# Altium PCB pcb.PcbDoc (part 1 of 2)
Units mm, origin at the board's own origin, x right, y up, seen from the top; angles counter-clockwise.
Board outline 220 x 120 mm, 8 copper layers (Top Layer, Internal 1, Internal 2, Internal 3, Internal 4, Internal 5, Internal 6, Bottom Layer), stack 1.684 mm thick; 227 components, 231 nets, 1122 pads, 16 vias.
Unrouted connection lines stored in the file: 734.
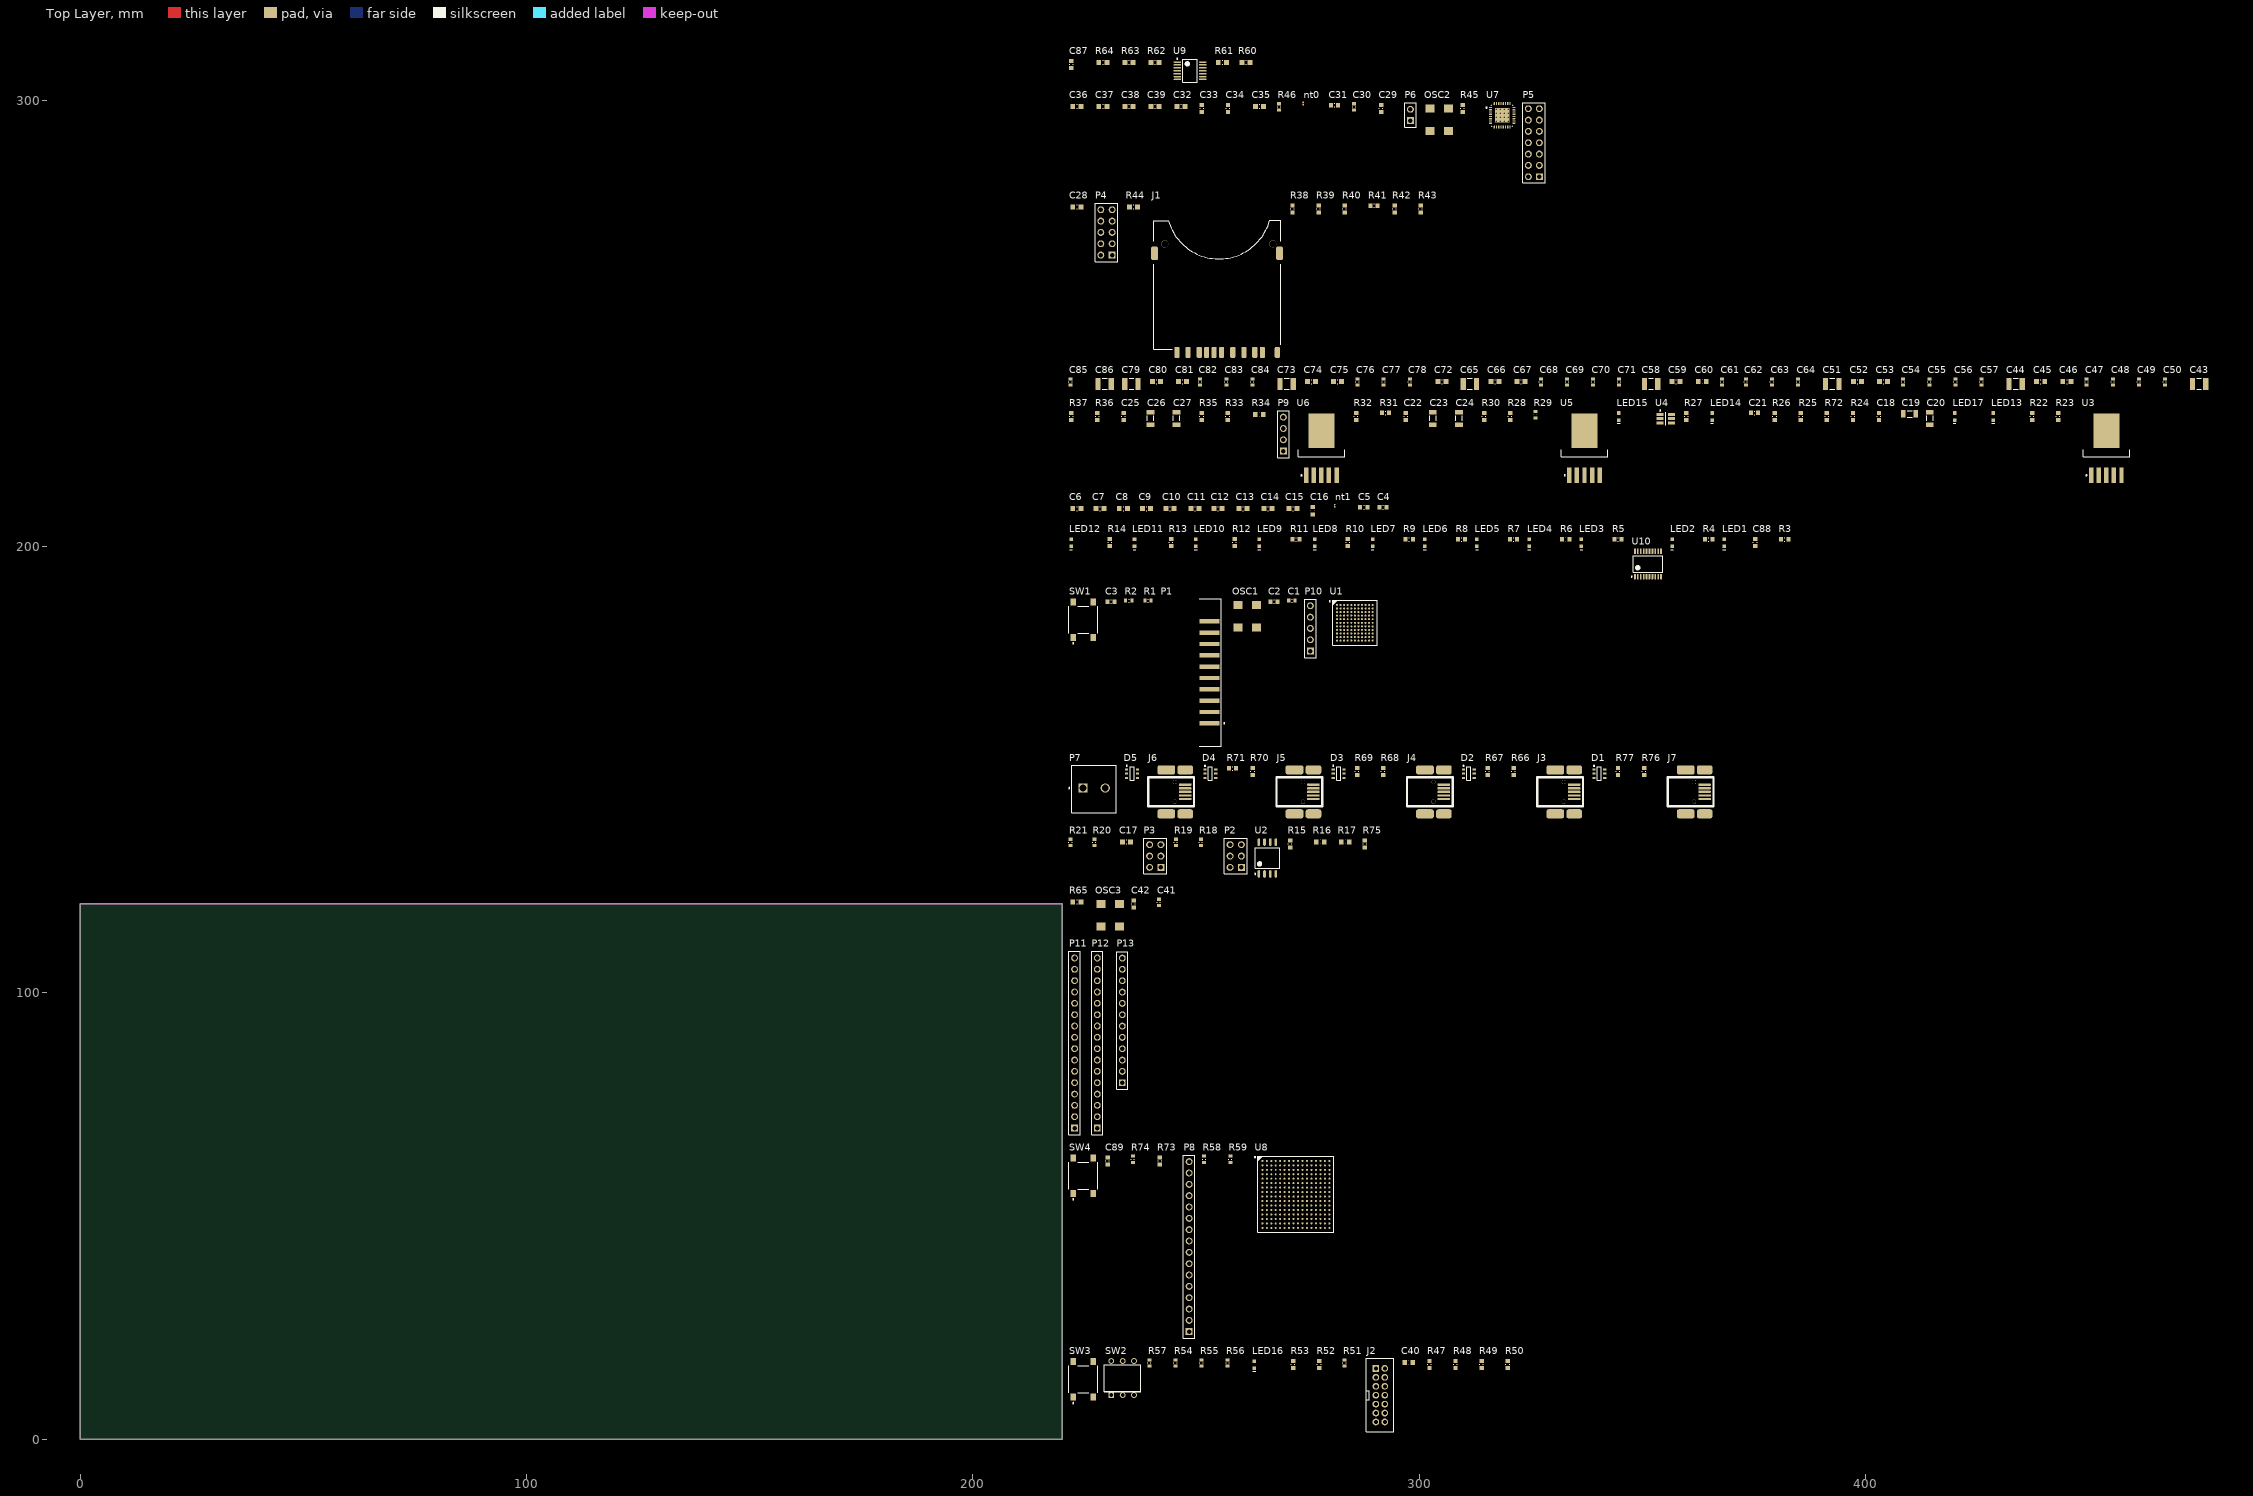
[diagram p0: Top Layer view]
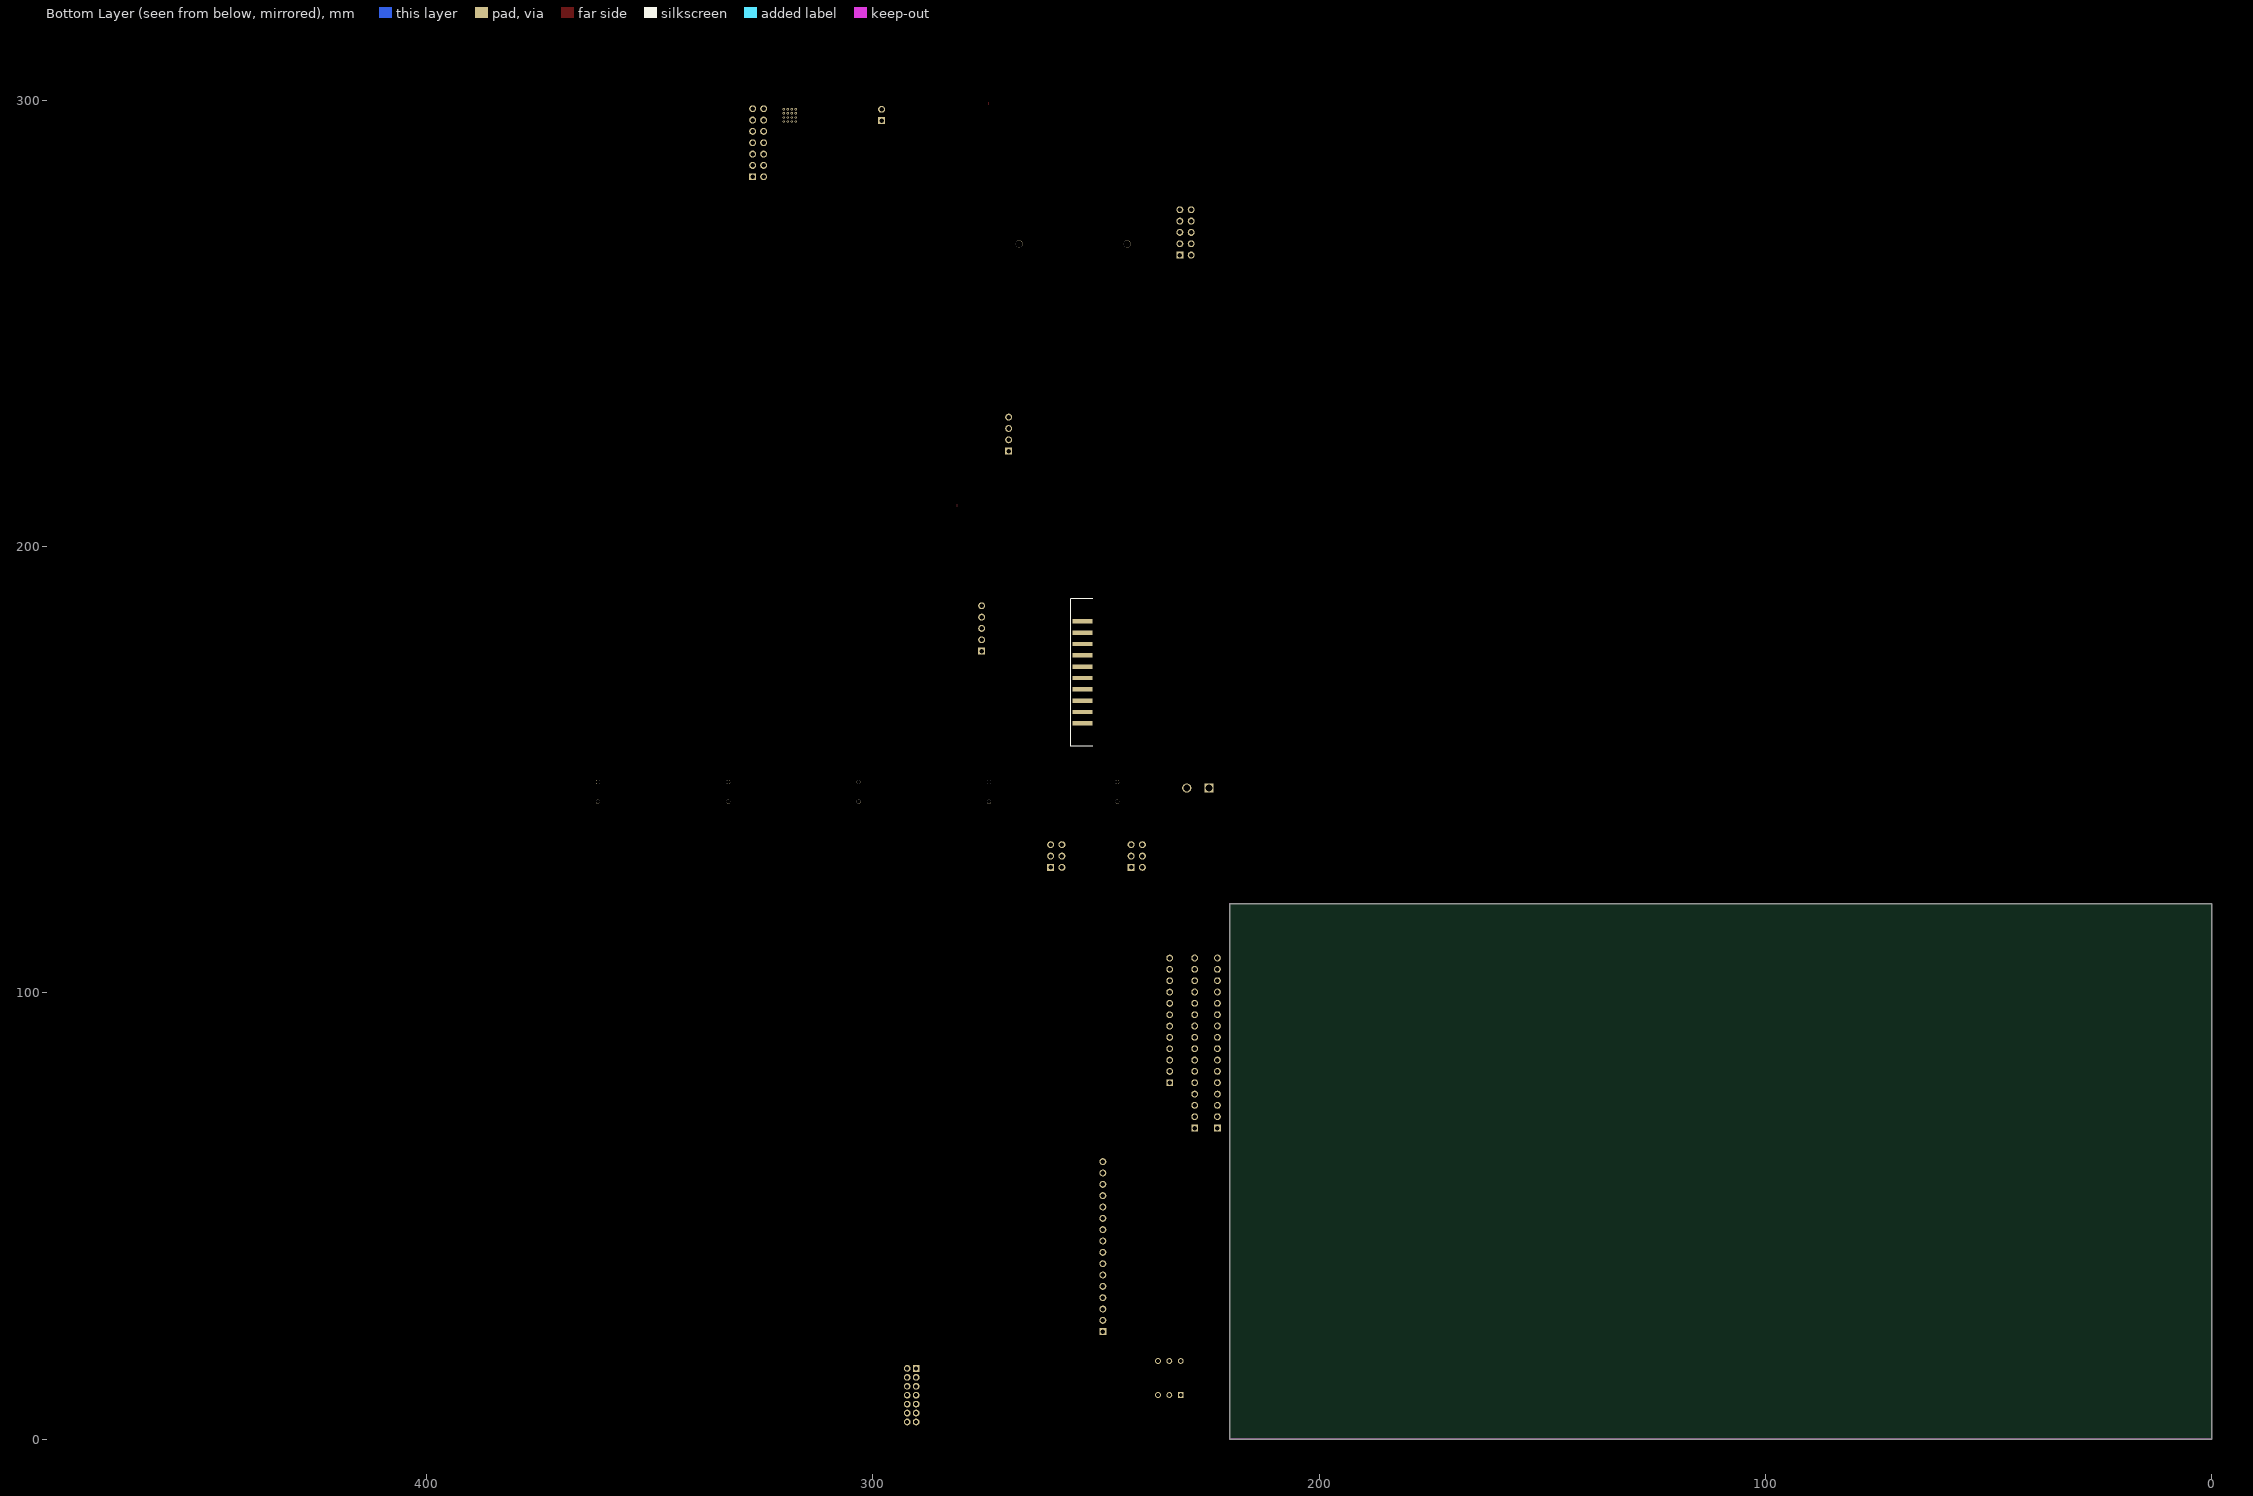
[diagram p1: Bottom Layer view, seen from below]

## Layer stack, top to bottom
Top Solder: solder mask 0.0102, Solder Resist, Dk 3.5
Top Layer: signal copper 0.0356
Dielectric 1: core 0.254, FR-4, Dk 4.2
Internal 1: signal copper 0.036
Dielectric 3: prepreg 0.127, Dk 4.2
Internal 2: signal copper 0.036
Dielectric 4: core 0.254, Dk 4.2
Internal 3: signal copper 0.036
Dielectric 5: prepreg 0.127, Dk 4.2
Internal 4: signal copper 0.036
Dielectric 6: core 0.254, Dk 4.2
Internal 5: signal copper 0.036
Dielectric 7: prepreg 0.127, Dk 4.2
Internal 6: signal copper 0.036
Dielectric 2: core 0.254, Dk 4.2
Bottom Layer: signal copper 0.0356
Bottom Solder: solder mask 0.0102, Solder Resist, Dk 3.5

## Board outline
0,0 0,120 220,120 220,0

## Design rules (kind name [scope] priority, off if disabled: settings)
Clearance [All] p1: gap=0.254
DiffPairsRouting [All] p1: maxlimit=0.254 minlimit=0.254 mostfreqgap=0.254 toplayer_minwidth=0.381 toplayer_maxwidth=0.381 toplayer_prefwidth=0.381 midlayer1_minwidth=0.381 midlayer1_maxwidth=0.381 midlayer1_prefwidth=0.381 midlayer2_minwidth=0.381 midlayer2_maxwidth=0.381 midlayer2_prefwidth=0.381 midlayer3_minwidth=0.381 midlayer3_maxwidth=0.381 midlayer3_prefwidth=0.381 midlayer4_minwidth=0.381 midlayer4_maxwidth=0.381 midlayer4_prefwidth=0.381 midlayer5_minwidth=0.381 midlayer5_maxwidth=0.381 midlayer5_prefwidth=0.381 midlayer6_minwidth=0.381 midlayer6_maxwidth=0.381 midlayer6_prefwidth=0.381 bottomlayer_minwidth=0.381 bottomlayer_maxwidth=0.381 bottomlayer_prefwidth=0.381 maxuncoupledlength=12.7
PolygonConnect [All] p1: connectstyle=Relief reliefconductorwidth=0.254 reliefentries=4 polygonreliefangle="90 Angle" airgapwidth=0.254
RoomDefinition USB_Transceiver [InComponentClass('USB_Transceiver')] p1: confinementstyle=ConfineIn formatcopy=TRUE lockcomponents=FALSE outline 221.145,303.647 263.947,303.647 263.947,312.248 221.145,312.248
RoomDefinition "USB 2.0 PHY" [InComponentClass('USB 2.0 PHY')] p2: confinementstyle=ConfineIn formatcopy=TRUE lockcomponents=FALSE outline 221.145,281.146 328.575,281.146 328.575,302.397 221.145,302.397
RoomDefinition SD [InComponentClass('SD')] p3: confinementstyle=ConfineIn formatcopy=TRUE lockcomponents=FALSE outline 221.145,242.019 304.224,242.019 304.224,279.896 221.145,279.896
RoomDefinition "Power Supply" [InComponentClass('Power Supply')] p4: confinementstyle=ConfineIn formatcopy=TRUE lockcomponents=FALSE outline 221.145,234.694 477.232,234.694 477.232,240.769 221.145,240.769
RoomDefinition Power_1 [InComponentClass('Power')] p5: confinementstyle=ConfineIn formatcopy=TRUE lockcomponents=FALSE outline 221.145,213.543 459.806,213.543 459.806,233.419 221.145,233.419
RoomDefinition Power [InComponentClass('Power')] p6: confinementstyle=ConfineIn formatcopy=TRUE lockcomponents=FALSE outline 221.145,213.543 459.806,213.543 459.806,233.419 221.145,233.419
RoomDefinition LEDs [InComponentClass('LEDs')] p7: confinementstyle=ConfineIn formatcopy=TRUE lockcomponents=FALSE outline 221.145,192.417 383.553,192.417 383.553,205.117 221.145,205.117
RoomDefinition IO [InComponentClass('IO')] p8: confinementstyle=ConfineIn formatcopy=TRUE lockcomponents=FALSE outline 221.145,155.065 291.248,155.065 291.248,191.167 221.145,191.167
RoomDefinition Connectors [InComponentClass('Connectors')] p9: confinementstyle=ConfineIn formatcopy=TRUE lockcomponents=FALSE outline 221.145,138.864 366.327,138.864 366.327,153.815 221.145,153.815
RoomDefinition "Configuration memory" [InComponentClass('Configuration memory')] p10: confinementstyle=ConfineIn formatcopy=TRUE lockcomponents=FALSE outline 221.145,125.414 291.748,125.414 291.748,137.614 221.145,137.614
RoomDefinition Bank35 [InComponentClass('Bank35')] p11: confinementstyle=ConfineIn formatcopy=TRUE lockcomponents=FALSE outline 221.145,113.488 245.296,113.488 245.296,124.139 221.145,124.139
RoomDefinition Bank15 [InComponentClass('Bank15')] p12: confinementstyle=ConfineIn formatcopy=TRUE lockcomponents=FALSE outline 221.145,67.886 236.446,67.886 236.446,112.238 221.145,112.238
RoomDefinition BANK14 [InComponentClass('BANK14')] p13: confinementstyle=ConfineIn formatcopy=TRUE lockcomponents=FALSE outline 221.145,22.259 281.523,22.259 281.523,66.611 221.145,66.611
RoomDefinition BANK0 [InComponentClass('BANK0')] p14: confinementstyle=ConfineIn formatcopy=TRUE lockcomponents=FALSE outline 221.145,1.408 323.75,1.408 323.75,20.983 221.145,20.983
RoutingVias [All] p1: holewidth=0.711 width=1.27 viastyle="Through Hole" minholewidth=0.711 minwidth=1.27 maxholewidth=0.711 maxwidth=1.27
SolderMaskExpansion [All] p1: expansion=0.102
Width [All] p1: maxlimit=0.254 minlimit=0.254 preferedwidth=0.254
29 further rules are at their usual default settings.

## Classes and differential pairs
net class EBI.D[0..15]: EBI.D0 EBI.D1 EBI.D2 EBI.D3 EBI.D4 EBI.D5 EBI.D6 EBI.D7 EBI.D8 EBI.D9 EBI.D10 EBI.D11 EBI.D12 EBI.D13 EBI.D14 EBI.D15
net class EBI.A[0..15]: EBI.A0 EBI.A1 EBI.A2 EBI.A3 EBI.A4 EBI.A5 EBI.A6 EBI.A7 EBI.A8 EBI.A9 EBI.A10 EBI.A11 EBI.A12 EBI.A13 EBI.A14 EBI.A15
component class USB_Transceiver: C87 R60 R61 R62 R63 R64 U9
component class "USB 2.0 PHY": C29 C30 C31 C32 C33 C34 C35 C36 C37 C38 C39 nt0 OSC2 P5 P6 R45 R46 U7
component class SD: C28 J1 P4 R38 R39 R40 R41 R42 R43 R44
component class Power: C18 C19 C20 C21 C22 C23 C24 C25 C26 C27 LED13 LED14 LED15 LED17 P9 R22 R23 R24 R25 R26 R27 R28 R29 R30 R31 R32 R33 R34 R35 R36 R37 R72 U3 U4 U5 U6
component class "Power Supply": C43 C44 C45 C46 C47 C48 C49 C50 C51 C52 C53 C54 C55 C56 C57 C58 C59 C60 C61 C62 C63 C64 C65 C66 C67 C68 C69 C70 C71 C72 C73 C74 C75 C76 C77 C78 C79 C80 C81 C82 C83 C84 C85 C86
component class LEDs: C88 LED1 LED2 LED3 LED4 LED5 LED6 LED7 LED8 LED9 LED10 LED11 LED12 R3 R4 R5 R6 R7 R8 R9 R10 R11 R12 R13 R14 U10
component class IO: C1 C2 C3 OSC1 P1 P10 R1 R2 SW1 U1
component class Connectors: D1 D2 D3 D4 D5 J3 J4 J5 J6 J7 P7 R66 R67 R68 R69 R70 R71 R76 R77
component class "Configuration memory": C17 P2 P3 R15 R16 R17 R18 R19 R20 R21 R75 U2
component class Bank35: C41 C42 OSC3 R65
component class Bank15: P11 P12 P13
component class BANK14: C89 P8 R58 R59 R73 R74 SW4 U8
component class BANK0: C40 J2 LED16 R47 R48 R49 R50 R51 R52 R53 R54 R55 R56 R57 SW2 SW3
differential pair USB2_HS.D: +USB2_HS.D_P -USB2_HS.D_N

## Components (designator, comment, footprint, x,y, rotation, side; value= is the part's Value field where it differs from the comment)
C1 "CAP 10nF 16V 0603(1608)" CAPC0603(1608)100_L 271.447,187.892 r0 top
C2 "CAP 15pF 16V 0603(1608)" CAPC0603(1608)100_N 267.472,187.692 r0 top
C3 "CAP 1uF 16V 0603(1608)" CAPC0603(1608)100_N 230.945,187.692 r0 top
C4 "CAP 1uF 16V 0603(1608)" CAPC0603(1608)100_N 291.898,208.818 r0 top
C5 "CAP 4.7uF 16V 0603(1608)" CAPC0603(1608)100_N 287.573,208.818 r0 top
C6 "CAP 100nF 16V 0603(1608)" CAPC0603(1608)100_M 223.27,208.518 r0 top
C7 "CAP 100nF 16V 0603(1608)" CAPC0603(1608)100_M 228.47,208.518 r0 top
C8 "CAP 100nF 16V 0603(1608)" CAPC0603(1608)100_M 233.695,208.518 r0 top
C9 "CAP 100nF 16V 0603(1608)" CAPC0603(1608)100_M 238.921,208.518 r0 top
C10 "CAP 100nF 16V 0603(1608)" CAPC0603(1608)100_M 244.146,208.518 r0 top
C11 "CAP 100nF 16V 0603(1608)" CAPC0603(1608)100_M 249.721,208.518 r0 top
C12 "CAP 100nF 16V 0603(1608)" CAPC0603(1608)100_M 254.946,208.518 r0 top
C13 "CAP 100nF 16V 0603(1608)" CAPC0603(1608)100_M 260.547,208.518 r0 top
C14 "CAP 100nF 16V 0603(1608)" CAPC0603(1608)100_M 266.147,208.518 r0 top
C15 "CAP 100nF 16V 0603(1608)" CAPC0603(1608)100_M 271.722,208.518 r0 top
C16 "CAP 10uF 10V 0603(1608)" CAPC0603(1608)100_N 276.123,208.043 r90 top
C17 "CAP 100nF 16V 0603(1608)" CAPC0603(1608)100_M 234.445,133.839 r0 top
C18 "CAP 2.2uF 16V 0603(1608)" CAPC0603(1608)55_N 403.004,229.194 r90 top
C19 "CAP 100uF 10V 1206(3216)" CAPC1206(3216)190_L 409.854,229.744 r0 top
C20 "CAP 100uF 10V 1206(3216)" CAPC1206(3216)190_L 414.404,228.719 r90 top
C21 "CAP 1uF 16V 0603(1608)" CAPC0603(1608)100_N 375.077,229.969 r0 top
C22 "CAP 2.2uF 16V 0603(1608)" CAPC0603(1608)55_N 297.024,229.194 r90 top
C23 "CAP 100uF 10V 1206(3216)" CAPC1206(3216)190_L 303.049,228.719 r90 top
C24 "CAP 100uF 10V 1206(3216)" CAPC1206(3216)190_L 308.899,228.719 r90 top
C25 "CAP 2.2uF 16V 0603(1608)" CAPC0603(1608)55_N 233.745,229.194 r90 top
C26 "CAP 100uF 10V 1206(3216)" CAPC1206(3216)190_L 239.796,228.719 r90 top
C27 "CAP 100uF 10V 1206(3216)" CAPC1206(3216)190_L 245.621,228.719 r90 top
C28 "CAP 100nF 16V 0603(1608)" CAPC0603(1608)100_M 223.27,276.121 r0 top
C29 "CAP 1uF 16V 0603(1608)" CAPC0603(1608)100_N 291.448,298.172 r90 top
C30 "CAP 10nF 16V 0603(1608)" CAPC0603(1608)100_L 285.398,298.522 r90 top
C31 "CAP 15pF 16V 0603(1608)" CAPC0603(1608)100_N 281.023,298.922 r0 top
C32 "CAP 100nF 16V 0603(1608)" CAPC0603(1608)100_M 246.646,298.622 r0 top
C33 "CAP 4.7uF 16V 0603(1608)" CAPC0603(1608)100_N 251.296,298.172 r90 top
C34 "CAP 4.7uF 16V 0603(1608)" CAPC0603(1608)100_N 257.147,298.172 r90 top
C35 "CAP 100nF 16V 0603(1608)" CAPC0603(1608)100_M 264.172,298.622 r0 top
C36 "CAP 100nF 16V 0603(1608)" CAPC0603(1608)100_M 223.27,298.622 r0 top
C37 "CAP 100nF 16V 0603(1608)" CAPC0603(1608)100_M 229.095,298.622 r0 top
C38 "CAP 100nF 16V 0603(1608)" CAPC0603(1608)100_M 234.945,298.622 r0 top
C39 "CAP 100nF 16V 0603(1608)" CAPC0603(1608)100_M 240.796,298.622 r0 top
C40 "CAP 100nF 16V 0603(1608)" CAPC0603(1608)100_M 297.649,17.208 r0 top
C41 "CAP 10nF 16V 0603(1608)" CAPC0603(1608)100_L 241.671,120.288 r90 top
C42 "CAP 15pF 16V 0603(1608)" CAPC0603(1608)100_N 236.021,119.913 r90 top
C43 "GRM32ER60J107ME20L" CAPC1210(3225)250_N 474.707,236.469 r0 top
C44 "GRM32ER60J107ME20L" CAPC1210(3225)250_N 433.605,236.469 r0 top
C45 "CAP 4.7uF 10V 0603(1608)" CAPC0603(1608)100_M 439.23,236.994 r0 top
C46 "CAP 4.7uF 10V 0603(1608)" CAPC0603(1608)100_M 445.081,236.994 r0 top
C47 "CAP 470nF 10V 0603(1608)" CAPC0603(1608)100_L 449.531,236.894 r90 top
C48 "CAP 470nF 10V 0603(1608)" CAPC0603(1608)100_L 455.381,236.894 r90 top
C49 "CAP 470nF 10V 0603(1608)" CAPC0603(1608)100_L 461.207,236.894 r90 top
C50 "CAP 470nF 10V 0603(1608)" CAPC0603(1608)100_L 467.057,236.894 r90 top
C51 "GRM32ER60J107ME20L" CAPC1210(3225)250_N 392.528,236.469 r0 top
C52 "CAP 4.7uF 10V 0603(1608)" CAPC0603(1608)100_M 398.153,236.994 r0 top
C53 "CAP 4.7uF 10V 0603(1608)" CAPC0603(1608)100_M 403.979,236.994 r0 top
C54 "CAP 470nF 10V 0603(1608)" CAPC0603(1608)100_L 408.429,236.894 r90 top
C55 "CAP 470nF 10V 0603(1608)" CAPC0603(1608)100_L 414.279,236.894 r90 top
C56 "CAP 470nF 10V 0603(1608)" CAPC0603(1608)100_L 420.13,236.894 r90 top
C57 "CAP 470nF 10V 0603(1608)" CAPC0603(1608)100_L 425.98,236.894 r90 top
C58 "GRM32ER60J107ME20L" CAPC1210(3225)250_N 351.926,236.469 r0 top
C59 "CAP 4.7uF 10V 0603(1608)" CAPC0603(1608)100_M 357.551,236.994 r0 top
C60 "CAP 4.7uF 10V 0603(1608)" CAPC0603(1608)100_M 363.402,236.994 r0 top
C61 "CAP 470nF 10V 0603(1608)" CAPC0603(1608)100_L 367.852,236.894 r90 top
C62 "CAP 470nF 10V 0603(1608)" CAPC0603(1608)100_L 373.177,236.894 r90 top
C63 "CAP 470nF 10V 0603(1608)" CAPC0603(1608)100_L 379.028,236.894 r90 top
C64 "CAP 470nF 10V 0603(1608)" CAPC0603(1608)100_L 384.878,236.894 r90 top
C65 "GRM32ER60J107ME20L" CAPC1210(3225)250_N 311.349,236.469 r0 top
C66 "CAP 4.7uF 10V 0603(1608)" CAPC0603(1608)100_M 316.974,236.994 r0 top
C67 "CAP 4.7uF 10V 0603(1608)" CAPC0603(1608)100_M 322.825,236.994 r0 top
C68 "CAP 470nF 10V 0603(1608)" CAPC0603(1608)100_L 327.275,236.894 r90 top
C69 "CAP 470nF 10V 0603(1608)" CAPC0603(1608)100_L 333.125,236.894 r90 top
C70 "CAP 470nF 10V 0603(1608)" CAPC0603(1608)100_L 338.951,236.894 r90 top
C71 "CAP 470nF 10V 0603(1608)" CAPC0603(1608)100_L 344.801,236.894 r90 top
C72 "CAP 100nF 16V 0603(1608)" CAPC0603(1608)100_M 305.099,236.994 r0 top
C73 "GRM32ER60J107ME20L" CAPC1210(3225)250_N 270.272,236.469 r0 top
C74 "CAP 4.7uF 10V 0603(1608)" CAPC0603(1608)100_M 275.872,236.994 r0 top
C75 "CAP 4.7uF 10V 0603(1608)" CAPC0603(1608)100_M 281.723,236.994 r0 top
C76 "CAP 470nF 10V 0603(1608)" CAPC0603(1608)100_L 286.173,236.894 r90 top
C77 "CAP 470nF 10V 0603(1608)" CAPC0603(1608)100_L 292.023,236.894 r90 top
C78 "CAP 470nF 10V 0603(1608)" CAPC0603(1608)100_L 297.874,236.894 r90 top
C79 "GRM32ER60J107ME20L" CAPC1210(3225)250_N 235.521,236.469 r0 top
C80 "CAP 4.7uF 10V 0603(1608)" CAPC0603(1608)100_M 241.146,236.994 r0 top
C81 "CAP 4.7uF 10V 0603(1608)" CAPC0603(1608)100_M 246.996,236.994 r0 top
C82 "CAP 470nF 10V 0603(1608)" CAPC0603(1608)100_L 250.921,236.894 r90 top
C83 "CAP 470nF 10V 0603(1608)" CAPC0603(1608)100_L 256.772,236.894 r90 top
C84 "CAP 470nF 10V 0603(1608)" CAPC0603(1608)100_L 262.622,236.894 r90 top
C85 "CAP 470nF 10V 0603(1608)" CAPC0603(1608)100_L 221.87,236.894 r90 top
C86 "GRM32ER60J107ME20L" CAPC1210(3225)250_N 229.495,236.469 r0 top
C87 "CAP 1uF 16V 0603(1608)" CAPC0603(1608)100_N 222.07,308.022 r90 top
C88 "CAP 1uF 16V 0603(1608)" CAPC0603(1608)100_N 375.277,200.892 r90 top
C89 "CAP 1uF 16V 0603(1608)" CAPC0603(1608)100_N 230.17,62.386 r90 top
D1 "IP4220CZ6" "NXP SOT457" 340.351,149.165 r0 top
D2 "IP4220CZ6" "NXP SOT457" 311.124,149.165 r0 top
D3 "IP4220CZ6" "NXP SOT457" 281.923,149.165 r0 top
D4 "IP4220CZ6" "NXP SOT457" 253.196,149.165 r0 top
D5 "IP4220CZ6" "NXP SOT457" 235.646,149.165 r0 top
J1 "KSDC012551" KONV-KSDC012551_V 254.696,255.67 r0 top
J2 "2x7 2mm header" "2x7 2mm" 290.273,15.883 r0 top
J3 "67503-1020" MOLX-67503-1020_V 334.7,146.665 r0 top
J4 "67503-1020" MOLX-67503-1020_V 305.499,146.665 r0 top
J5 "67503-1020" MOLX-67503-1020_V 276.273,146.665 r0 top
J6 "67503-1020" MOLX-67503-1020_V 247.546,146.665 r0 top
J7 "67503-1020" MOLX-67503-1020_V 363.927,146.665 r0 top
LED1 "150060RS75000" 0603_A 368.352,200.842 r90 top
LED2 "150060RS75000" 0603_A 356.651,200.842 r90 top
LED3 "150060RS75000" 0603_A 336.325,200.842 r90 top
LED4 "150060RS75000" 0603_A 324.625,200.842 r90 top
LED5 "150060RS75000" 0603_A 312.924,200.842 r90 top
LED6 "150060RS75000" 0603_A 301.249,200.842 r90 top
LED7 "150060RS75000" 0603_A 289.548,200.842 r90 top
LED8 "150060RS75000" 0603_A 276.598,200.842 r90 top
LED9 "150060RS75000" 0603_A 264.147,200.842 r90 top
LED10 "150060RS75000" 0603_A 249.921,200.842 r90 top
LED11 "150060RS75000" 0603_A 236.196,200.842 r90 top
LED12 "150060RS75000" 0603_A 221.995,200.842 r90 top
LED13 "150060RS75000" 0603_A 428.605,229.144 r90 top
LED14 "150060RS75000" 0603_A 365.602,229.144 r90 top
LED15 "150060RS75000" 0603_A 344.701,229.144 r90 top
LED16 "150060RS75000" 0603_A 263.047,16.708 r90 top
LED17 "150060RS75000" 0603_A 419.955,229.144 r90 top
nt0 "net tie" "net tie" 274.047,299.272 r90 top net-tie
nt1 "net tie" "net tie" 281.098,209.168 r90 top net-tie
OSC1 "FXO-HC736R-48" FXO-HC73 258.347,187.817 r0 top
OSC2 "FXO-H736R-24" FXO-HC73 301.374,299.047 r0 top
OSC3 "FXO-HC736R-100" FXO-HC73 227.67,120.813 r0 top
P1 "BH2542-20-SPGRH-3.0" PCE-BH2542-20-SPGRH-3.0_VA 252.996,171.841 r90 top
P2 "TSW-103-08-T-D" SMTC-TSW-103-08-X-D 260.147,128.139 r90 top
P3 "TSW-103-08-T-D" SMTC-TSW-103-08-X-D 242.121,128.139 r90 top
P4 "TSW-105-05-T-D" SMTC-TSW-105-05-X-D 231.195,265.32 r90 top
P5 "HTSW-107-42-F-D" SMTC-HTSW-107-42-X-D 326.9,282.871 r90 top
P6 "TSW-102-26-L-S" SMTC-TSW-102-26-XX-S 298.024,295.447 r90 top
P7 "SCREW-5.0/5.08 2WAYS" SCREW-5.0-2WAYS_V 227.145,145.915 r0 top
P8 "TSW-116-08-G-S" SMTC-TSW-116-08-X-S 248.446,24.109 r90 top
P9 "TSW-104-08-G-S" SMTC-TSW-104-08-X-S 269.547,221.393 r90 top
P10 "TSW-105-05-T-S" SMTC-TSW-105-05-X-S 275.597,176.591 r90 top
P11 "MTLW-116-07-F-S-265" SMTC-MTLW-116-07-X-S-265 222.77,69.736 r90 top
P12 "MTLW-116-07-F-S-265" SMTC-MTLW-116-07-X-S-265 227.87,69.736 r90 top
P13 "MTLW-112-07-L-S-125" SMTC-MTLW-112-07-X-S-125 233.47,79.886 r90 top
R1 "15R 5% 0603(1608)" RESC0603(1608)_L 239.221,187.892 r0 top
R2 "15R 5% 0603(1608)" RESC0603(1608)_L 234.92,187.892 r0 top
R3 "470R 5% 0603(1608)" RESC0603(1608)_N 381.878,201.642 r0 top
R4 "470R 5% 0603(1608)" RESC0603(1608)_N 364.852,201.642 r0 top
R5 "470R 5% 0603(1608)" RESC0603(1608)_N 344.526,201.642 r0 top
R6 "470R 5% 0603(1608)" RESC0603(1608)_N 332.825,201.642 r0 top
R7 "470R 5% 0603(1608)" RESC0603(1608)_N 321.125,201.642 r0 top
R8 "470R 5% 0603(1608)" RESC0603(1608)_N 309.449,201.642 r0 top
R9 "470R 5% 0603(1608)" RESC0603(1608)_N 297.749,201.642 r0 top
R10 "470R 5% 0603(1608)" RESC0603(1608)_N 284.023,200.892 r90 top
R11 "470R 5% 0603(1608)" RESC0603(1608)_N 272.347,201.642 r0 top
R12 "470R 5% 0603(1608)" RESC0603(1608)_N 258.622,200.892 r90 top
R13 "470R 5% 0603(1608)" RESC0603(1608)_N 244.396,200.892 r90 top
R14 "470R 5% 0603(1608)" RESC0603(1608)_N 230.695,200.892 r90 top
R15 "4K7 5% 0603(1608)" RESC0603(1608)_N 271.047,133.389 r90 top
R16 "1K8 5% 0603(1608)" RESC0603(1608)_M 277.823,133.839 r0 top
R17 "1K8 5% 0603(1608)" RESC0603(1608)_M 283.423,133.839 r0 top
R18 "100R 5% 0603(1608)" RESC0603(1608)_L 251.071,133.739 r90 top
R19 "100R 5% 0603(1608)" RESC0603(1608)_L 245.471,133.739 r90 top
R20 "100R 5% 0603(1608)" RESC0603(1608)_L 227.195,133.739 r90 top
R21 "100R 5% 0603(1608)" RESC0603(1608)_L 221.87,133.739 r90 top
R22 "10K 1% 0603(1608)" RESC0603(1608)_N 437.305,229.194 r90 top
R23 "45K3 1% 0603(1608)" RESC0603(1608)_N 443.156,229.194 r90 top
R24 "10K 1% 0603(1608)" RESC0603(1608)_N 397.178,229.194 r90 top
R25 "470R 5% 0603(1608)" RESC0603(1608)_N 385.503,229.194 r90 top
R26 "470R 5% 0603(1608)" RESC0603(1608)_N 379.653,229.194 r90 top
R27 "470R 5% 0603(1608)" RESC0603(1608)_N 359.852,229.194 r90 top
R28 "10K 1% 0603(1608)" RESC0603(1608)_N 320.375,229.194 r90 top
R29 "20K 1% 0603(1608)" RESC0603(1608)_L 326.025,229.544 r90 top
R30 "10K 5% 0603(1608)" RESC0603(1608)_N 314.524,229.194 r90 top
R31 "10K 1% 0603(1608)" RESC0603(1608)_N 292.448,229.969 r0 top
R32 "4K7 5% 0603(1608)" RESC0603(1608)_N 285.848,229.194 r90 top
R33 "10K 1% 0603(1608)" RESC0603(1608)_N 257.097,229.194 r90 top
R34 "6K65 1% 0603(1608)" RESC0603(1608)_M 264.147,229.644 r0 top
R35 "10K 5% 0603(1608)" RESC0603(1608)_N 251.271,229.194 r90 top
R36 "10K 1% 0603(1608)" RESC0603(1608)_N 227.895,229.194 r90 top
R37 "10K 5% 0603(1608)" RESC0603(1608)_N 222.07,229.194 r90 top
R38 "100K 1% 0603(1608)" RESC0603(1608)_N 271.597,275.671 r90 top
R39 "100K 1% 0603(1608)" RESC0603(1608)_N 277.448,275.671 r90 top
R40 "100K 1% 0603(1608)" RESC0603(1608)_N 283.298,275.671 r90 top
R41 "100K 1% 0603(1608)" RESC0603(1608)_N 289.898,276.421 r0 top
R42 "100K 1% 0603(1608)" RESC0603(1608)_N 294.473,275.671 r90 top
R43 "4K7 1% 0603(1608)" RESC0603(1608)_N 300.299,275.671 r90 top
R44 "300K 1% 0603(1608)" RESC0603(1608)_M 235.946,276.121 r0 top
R45 "820R 5% 0603(1608)" RESC0603(1608)_N 309.724,298.172 r90 top
R46 "12K 1% 0603(1608)" RESC0603(1608)_L 268.622,298.522 r90 top
R47 "10K 5% 0603(1608)" RESC0603(1608)_N 302.299,16.758 r90 top
R48 "10K 5% 0603(1608)" RESC0603(1608)_N 308.124,16.758 r90 top
R49 "10K 5% 0603(1608)" RESC0603(1608)_N 313.974,16.758 r90 top
R50 "10K 5% 0603(1608)" RESC0603(1608)_N 319.825,16.758 r90 top
R51 "200R 5% 0603(1608)" RESC0603(1608)_L 283.248,17.108 r90 top
R52 "4K7 1% 0603(1608)" RESC0603(1608)_N 277.598,16.758 r90 top
R53 "4K7 1% 0603(1608)" RESC0603(1608)_N 271.747,16.758 r90 top
R54 "1K 5% 0603(1608)" RESC0603(1608)_L 245.396,17.108 r90 top
R55 "1K 5% 0603(1608)" RESC0603(1608)_L 251.221,17.108 r90 top
R56 "1K 5% 0603(1608)" RESC0603(1608)_L 257.072,17.108 r90 top
R57 "100R 5% 0603(1608)" RESC0603(1608)_L 239.546,17.108 r90 top
R58 "1K 5% 0603(1608)" RESC0603(1608)_L 251.821,62.736 r90 top
R59 "1K 5% 0603(1608)" RESC0603(1608)_L 257.672,62.736 r90 top
R60 "33R 5% 0603(1608)" RESC0603(1608)_M 261.197,308.498 r0 top
R61 "33R 5% 0603(1608)" RESC0603(1608)_M 255.872,308.498 r0 top
R62 "1K2 1% 0603(1608)" RESC0603(1608)_M 240.796,308.498 r0 top
R63 "33R 5% 0603(1608)" RESC0603(1608)_M 234.945,308.498 r0 top
R64 "33R 5% 0603(1608)" RESC0603(1608)_M 229.095,308.498 r0 top
R65 "1K2 1% 0603(1608)" RESC0603(1608)_M 223.27,120.388 r0 top
R66 "Jumper 0603(1608)" RESC0603(1608)_N 321.15,149.59 r90 top
R67 "Jumper 0603(1608)" RESC0603(1608)_N 315.299,149.59 r90 top
R68 "Jumper 0603(1608)" RESC0603(1608)_N 291.923,149.59 r90 top
R69 "Jumper 0603(1608)" RESC0603(1608)_N 286.073,149.59 r90 top
R70 "Jumper 0603(1608)" RESC0603(1608)_N 262.697,149.59 r90 top
R71 "Jumper 0603(1608)" RESC0603(1608)_N 258.122,150.34 r0 top
R72 "470R 5% 0603(1608)" RESC0603(1608)_N 391.328,229.194 r90 top
R73 "4K7 1% 0603(1608)" RESC0603(1608)_N 241.871,62.386 r90 top
R74 "200R 5% 0603(1608)" RESC0603(1608)_L 235.821,62.736 r90 top
R75 "4K7 5% 0603(1608)" RESC0603(1608)_N 287.823,133.389 r90 top
R76 "Jumper 0603(1608)" RESC0603(1608)_N 350.376,149.59 r90 top
R77 "Jumper 0603(1608)" RESC0603(1608)_N 344.526,149.59 r90 top
SW1 "B3S-1000" OMRON-B3S-1000-4_V 224.72,183.616 r90 top
SW2 "418127270903" 418127270903 233.545,13.733 r0 top
SW3 "B3S-1000" OMRON-B3S-1000-4_V 224.72,13.433 r90 top
SW4 "B3S-1000" OMRON-B3S-1000-4_V 224.72,59.06 r90 top
U1 "EFM32GG990F1024-BGA112" ENMR-BGA112 285.573,182.941 r0 top
U2 "N25Q128A13ESE40E" MICT-SE-8_N 265.972,130.239 r90 top
U3 "LP38501ATJ-ADJ/NOPB" TJ5A_M 453.931,222.018 r90 top
U4 "LT6700HVIS6-3#TRPBF" LT-S6_M 355.226,228.669 r0 top
U5 "LP38501ATJ-ADJ/NOPB" TJ5A_M 337.025,222.018 r90 top
U6 "LP38501ATJ-ADJ/NOPB" TJ5A_M 278.073,222.018 r90 top
U7 "USB3300-EZK-TR" MCHP-QFN-32-5x5_V2 318.575,296.622 r0 top
U8 "XC7A35T-2FTG256I" FTG256 272.347,54.885 r0 top
U9 "TUSB2551APW" PW14_N 248.646,306.622 r0 top
U10 "SN74HC240PWR" PW0020A_L 351.251,196.142 r90 top

## Footprints (in the part's own frame and the unit in brackets; to place one, negate y for a bottom-side part, rotate by r counter-clockwise, add the part's x,y. Pads: shape width x height; smd on the part's side, far side on the other; paste and mask are expansions set on the pad)
"2x7 2mm" [mm] "2x7 2mm pitch molex vertical shrouded header"
  rect 1.5x1.5 hole 0.9: 1(0,0)
  round 1.5 hole 0.9: 2(2,0) 3(0,-2) 4(2,-2) 5(0,-4) 6(2,-4) 7(0,-6) 8(2,-6) 9(0,-8) 10(2,-8) 11(0,-10) 12(2,-10) 13(0,-12) 14(2,-12)
  silkscreen extent -2.15,-14.2 4,2.27, body extent -2.2,-14.3 4.1,2.35, height 6.41
0603_A [mm] "Chip LED, 2-Leads, Body 1.6x0.8mm, IPC Medium Density"
  rect 0.8x0.8 smd: 1(-0.8,0) 2(0.8,0)
  silkscreen extent -1.5,-0.3 -1.5,0.3, body extent -0.8,-0.4 0.8,0.4, height 0.7
418127270903 [mm] "03p, 2.54mm Pitch, Horizontal, IC Type, THT, raised Actuator, black, without Tape, Tube"
  rect 1.3x1.3 hole 0.8: 1(-2.54,-3.81)
  round 1.3 hole 0.8: 2(0,-3.81) 3(2.54,-3.81) 4(2.54,3.81) 5(0,3.81) 6(-2.54,3.81)
  silkscreen extent -4.08,-3.02 4.08,3.02, body extent -4.03,-3.93 4.03,3.94, height 4.35
CAPC0603(1608)55_N [mm] "Chip Capacitor, Body 1.6x0.8mm, Height 0.55mm, IPC Medium Density"
  rect 0.9x1 smd: 1(-0.8,0) 2(0.8,0)
  silkscreen extent -0.05,-0.4 0.05,0.4, body extent -0.87,-0.48 0.88,0.47, height 0.55
CAPC0603(1608)100_L [mm] "Chip Capacitor, Body 1.6x0.8mm, Height 1.0mm, IPC High Density"
  rect 0.7x0.9 smd: 1(-0.7,0) 2(0.7,0)
  silkscreen extent -0.05,-0.35 0.05,0.35, body extent -0.87,-0.47 0.88,0.48, height 1
CAPC0603(1608)100_M [mm] "Chip Capacitor, Body 1.6x0.8mm, Height 1.0mm, IPC Low Density"
  rect 1.1x1.1 smd: 1(-0.9,0) 2(0.9,0)
  silkscreen extent -0.05,-0.45 0.05,0.45, body extent -0.87,-0.47 0.88,0.48, height 1
CAPC0603(1608)100_N [mm] "Chip Capacitor, Body 1.6x0.8mm, Height 1.0mm, IPC Medium Density"
  rect 0.9x1 smd: 1(-0.8,0) 2(0.8,0)
  silkscreen extent -0.05,-0.4 0.05,0.4, body extent -0.87,-0.48 0.88,0.47, height 1
CAPC1206(3216)190_L [mm] "Chip Capacitor, Body 3.2x1.6mm, Height 1.9mm, IPC High Density"
  rect 0.95x1.7 smd: 1(-1.4,0) 2(1.4,0)
  silkscreen extent -0.55,-0.75 0.55,0.75, body extent -1.7,-0.9 1.7,0.9, height 1.9
CAPC1210(3225)250_N [mm] "Chip Capacitor, Body 3.2x2.5mm, Height 2.5mm, IPC Medium Density"
  rect 1.15x2.7 smd: 1(-1.5,0) 2(1.5,0)
  silkscreen extent -0.55,-1.25 0.55,1.25, body extent -1.7,-1.35 1.7,1.35, height 2.5
ENMR-BGA112 [mm] "BGA, 112-Balls, Body 10x10mm, Pitch 0.8mm"
  round 0.45 smd: A1(-4,4) A2(-3.2,4) A3(-2.4,4) A4(-1.6,4) A5(-0.8,4) A6(0,4) A7(0.8,4) A8(1.6,4) A9(2.4,4) A10(3.2,4) A11(4,4) B1(-4,3.2) B2(-3.2,3.2) B3(-2.4,3.2) B4(-1.6,3.2) B5(-0.8,3.2) B6(0,3.2) B7(0.8,3.2) B8(1.6,3.2) B9(2.4,3.2) B10(3.2,3.2) B11(4,3.2) C1(-4,2.4) C2(-3.2,2.4) C3(-2.4,2.4) C4(-1.6,2.4) C5(-0.8,2.4) C6(0,2.4) C7(0.8,2.4) C8(1.6,2.4) C9(2.4,2.4) C10(3.2,2.4) C11(4,2.4) D1(-4,1.6) D2(-3.2,1.6) D3(-2.4,1.6) D4(-1.6,1.6) D5(-0.8,1.6) D6(0,1.6) D7(0.8,1.6) D8(1.6,1.6) D9(2.4,1.6) D10(3.2,1.6) D11(4,1.6) E1(-4,0.8) E2(-3.2,0.8) E3(-2.4,0.8) E4(-1.6,0.8) E5(-0.8,0.8) E6(0,0.8) E7(0.8,0.8) E8(1.6,0.8) E9(2.4,0.8) E10(3.2,0.8) E11(4,0.8) F1(-4,0) F2(-3.2,0) F3(-2.4,0) F4(-1.6,0) F5(-0.8,0) F6(0,0) F7(0.8,0) F8(1.6,0) F9(2.4,0) F10(3.2,0) F11(4,0) G1(-4,-0.8) G2(-3.2,-0.8) G3(-2.4,-0.8) G4(-1.6,-0.8) G5(-0.8,-0.8) G6(0,-0.8) G7(0.8,-0.8) G8(1.6,-0.8) G9(2.4,-0.8) G10(3.2,-0.8) G11(4,-0.8) H1(-4,-1.6) H2(-3.2,-1.6) H3(-2.4,-1.6) H4(-1.6,-1.6) H5(-0.8,-1.6) H6(0,-1.6) H7(0.8,-1.6) H8(1.6,-1.6) H9(2.4,-1.6) H10(3.2,-1.6) H11(4,-1.6) J1(-4,-2.4) J2(-3.2,-2.4) J3(-2.4,-2.4) J4(-1.6,-2.4) J5(-0.8,-2.4) J6(0,-2.4) J7(0.8,-2.4) J8(1.6,-2.4) J9(2.4,-2.4) J10(3.2,-2.4) J11(4,-2.4) K1(-4,-3.2) K2(-3.2,-3.2) K3(-2.4,-3.2) K4(-1.6,-3.2) K5(-0.8,-3.2) K6(0,-3.2) K7(0.8,-3.2) K8(1.6,-3.2) K9(2.4,-3.2) K10(3.2,-3.2) K11(4,-3.2) L1(-4,-4) L2(-3.2,-4) L3(-2.4,-4) L4(-1.6,-4) L5(-0.8,-4) L6(0,-4) L7(0.8,-4) L8(1.6,-4) L9(2.4,-4) L10(3.2,-4) L11(4,-4)
  silkscreen extent -5.77,-5 5,5, body extent -5,-5 5,5, height 1.3
FTG256 [mm] "BGA, 256-Balls, Body 17x17mm, Pitch 1mm"
  round 0.45 smd: A1(-7.5,7.5) A2(-6.5,7.5) A3(-5.5,7.5) A4(-4.5,7.5) A5(-3.5,7.5) A6(-2.5,7.5) A7(-1.5,7.5) A8(-0.5,7.5) A9(0.5,7.5) A10(1.5,7.5) A11(2.5,7.5) A12(3.5,7.5) A13(4.5,7.5) A14(5.5,7.5) A15(6.5,7.5) A16(7.5,7.5) B1(-7.5,6.5) B2(-6.5,6.5) B3(-5.5,6.5) B4(-4.5,6.5) B5(-3.5,6.5) B6(-2.5,6.5) B7(-1.5,6.5) B8(-0.5,6.5) B9(0.5,6.5) B10(1.5,6.5) B11(2.5,6.5) B12(3.5,6.5) B13(4.5,6.5) B14(5.5,6.5) B15(6.5,6.5) B16(7.5,6.5) C1(-7.5,5.5) C2(-6.5,5.5) C3(-5.5,5.5) C4(-4.5,5.5) C5(-3.5,5.5) C6(-2.5,5.5) C7(-1.5,5.5) C8(-0.5,5.5) C9(0.5,5.5) C10(1.5,5.5) C11(2.5,5.5) C12(3.5,5.5) C13(4.5,5.5) C14(5.5,5.5) C15(6.5,5.5) C16(7.5,5.5) D1(-7.5,4.5) D2(-6.5,4.5) D3(-5.5,4.5) D4(-4.5,4.5) D5(-3.5,4.5) D6(-2.5,4.5) D7(-1.5,4.5) D8(-0.5,4.5) D9(0.5,4.5) D10(1.5,4.5) D11(2.5,4.5) D12(3.5,4.5) D13(4.5,4.5) D14(5.5,4.5) D15(6.5,4.5) D16(7.5,4.5) E1(-7.5,3.5) E2(-6.5,3.5) E3(-5.5,3.5) E4(-4.5,3.5) E5(-3.5,3.5) E6(-2.5,3.5) E7(-1.5,3.5) E8(-0.5,3.5) E9(0.5,3.5) E10(1.5,3.5) E11(2.5,3.5) E12(3.5,3.5) E13(4.5,3.5) E14(5.5,3.5) E15(6.5,3.5) E16(7.5,3.5) F1(-7.5,2.5) F2(-6.5,2.5) F3(-5.5,2.5) F4(-4.5,2.5) F5(-3.5,2.5) F6(-2.5,2.5) F7(-1.5,2.5) F8(-0.5,2.5) F9(0.5,2.5) F10(1.5,2.5) F11(2.5,2.5) F12(3.5,2.5) F13(4.5,2.5) F14(5.5,2.5) F15(6.5,2.5) F16(7.5,2.5) G1(-7.5,1.5) G2(-6.5,1.5) G3(-5.5,1.5) G4(-4.5,1.5) G5(-3.5,1.5) G6(-2.5,1.5) G7(-1.5,1.5) G8(-0.5,1.5) G9(0.5,1.5) G10(1.5,1.5) G11(2.5,1.5) G12(3.5,1.5) G13(4.5,1.5) G14(5.5,1.5) G15(6.5,1.5) G16(7.5,1.5) H1(-7.5,0.5) H2(-6.5,0.5) H3(-5.5,0.5) H4(-4.5,0.5) H5(-3.5,0.5) H6(-2.5,0.5) H7(-1.5,0.5) H8(-0.5,0.5) H9(0.5,0.5) H10(1.5,0.5) H11(2.5,0.5) H12(3.5,0.5) H13(4.5,0.5) H14(5.5,0.5) H15(6.5,0.5) H16(7.5,0.5) J1(-7.5,-0.5) J2(-6.5,-0.5) J3(-5.5,-0.5) J4(-4.5,-0.5) J5(-3.5,-0.5) J6(-2.5,-0.5) J7(-1.5,-0.5) J8(-0.5,-0.5) J9(0.5,-0.5) J10(1.5,-0.5) J11(2.5,-0.5) J12(3.5,-0.5) J13(4.5,-0.5) J14(5.5,-0.5) J15(6.5,-0.5) J16(7.5,-0.5) K1(-7.5,-1.5) K2(-6.5,-1.5) K3(-5.5,-1.5) K4(-4.5,-1.5) K5(-3.5,-1.5) K6(-2.5,-1.5) K7(-1.5,-1.5) K8(-0.5,-1.5) K9(0.5,-1.5) K10(1.5,-1.5) K11(2.5,-1.5) K12(3.5,-1.5) K13(4.5,-1.5) K14(5.5,-1.5) K15(6.5,-1.5) K16(7.5,-1.5) L1(-7.5,-2.5) L2(-6.5,-2.5) L3(-5.5,-2.5) L4(-4.5,-2.5) L5(-3.5,-2.5) L6(-2.5,-2.5) L7(-1.5,-2.5) L8(-0.5,-2.5) L9(0.5,-2.5) L10(1.5,-2.5) L11(2.5,-2.5) L12(3.5,-2.5) L13(4.5,-2.5) L14(5.5,-2.5) L15(6.5,-2.5) L16(7.5,-2.5) M1(-7.5,-3.5) M2(-6.5,-3.5) M3(-5.5,-3.5) M4(-4.5,-3.5) M5(-3.5,-3.5) M6(-2.5,-3.5) M7(-1.5,-3.5) M8(-0.5,-3.5) M9(0.5,-3.5) M10(1.5,-3.5) M11(2.5,-3.5) M12(3.5,-3.5) M13(4.5,-3.5) M14(5.5,-3.5) M15(6.5,-3.5) M16(7.5,-3.5) N1(-7.5,-4.5) N2(-6.5,-4.5) N3(-5.5,-4.5) N4(-4.5,-4.5) N5(-3.5,-4.5) N6(-2.5,-4.5) N7(-1.5,-4.5) N8(-0.5,-4.5) N9(0.5,-4.5) N10(1.5,-4.5) N11(2.5,-4.5) N12(3.5,-4.5) N13(4.5,-4.5) N14(5.5,-4.5) N15(6.5,-4.5) N16(7.5,-4.5) P1(-7.5,-5.5) P2(-6.5,-5.5) P3(-5.5,-5.5) P4(-4.5,-5.5) P5(-3.5,-5.5) P6(-2.5,-5.5) P7(-1.5,-5.5) P8(-0.5,-5.5) P9(0.5,-5.5) P10(1.5,-5.5) P11(2.5,-5.5) P12(3.5,-5.5) P13(4.5,-5.5) P14(5.5,-5.5) P15(6.5,-5.5) P16(7.5,-5.5) R1(-7.5,-6.5) R2(-6.5,-6.5) R3(-5.5,-6.5) R4(-4.5,-6.5) R5(-3.5,-6.5) R6(-2.5,-6.5) R7(-1.5,-6.5) R8(-0.5,-6.5) R9(0.5,-6.5) R10(1.5,-6.5) R11(2.5,-6.5) R12(3.5,-6.5) R13(4.5,-6.5) R14(5.5,-6.5) R15(6.5,-6.5) R16(7.5,-6.5) T1(-7.5,-7.5) T2(-6.5,-7.5) T3(-5.5,-7.5) T4(-4.5,-7.5) T5(-3.5,-7.5) T6(-2.5,-7.5) T7(-1.5,-7.5) T8(-0.5,-7.5) T9(0.5,-7.5) T10(1.5,-7.5) T11(2.5,-7.5) T12(3.5,-7.5) T13(4.5,-7.5) T14(5.5,-7.5) T15(6.5,-7.5) T16(7.5,-7.5)
  silkscreen extent -9.27,-8.5 8.5,8.5, body extent -8.5,-8.5 8.5,8.5, height 1.55
FXO-HC73 [mm] "MEMS oscillator 7x5 mm industry standard package"
  rect 2x1.8 smd: 1(1.016,-0.889) 2(1.016,-5.969) 3(5.216,-5.969) 4(5.216,-0.889)
  round 0.3 on Top Overlay: 3(-0.381,0.508)
  body extent 0.5,-7.18 5.71,0.32, height 1.4
KONV-KSDC012551_V [mm] "SD Card Socket"
  rrect50% 1.16x2.5 smd: 1(-6.48,-12.15) 2(-3.98,-12.15) 3(-0.68,-12.15) 4(1.03,-12.15) 5(3.53,-12.15) 6(6.03,-12.15) 7(8.45,-12.15) 8(10.15,-12.15) 9(-8.98,-12.15) CD(-2.33,-12.15) WP(13.5,-12.15)
  rrect50% 1.524x3.048 smd: GND1(14,10.05) GND2(-14,10.05)
  round 1.55 hole 1.55 unplated: MH1(12.5,12.15) MH2(-11.7,12.15)
  silkscreen extent -14.22,-11.4 14.22,17.4, body extent -14.32,-12.74 14.4,21.53, height 2.9
LT-S6_M [mm] "SOT23, 6-Leads, Body 2.9x1.63mm, Pitch 0.95mm, IPC Low Density"
  rect 1.6x0.65 smd: 1(-1.25,0.95) 2(-1.25,0) 3(-1.25,-0.95) 4(1.25,-0.95) 5(1.25,0) 6(1.25,0.95)
  silkscreen extent -1.37,-1.45 0.05,1.95, body extent -0.87,-1.45 0.87,1.45, height 1
MCHP-QFN-32-5x5_V2 [mm] "QFN, 32-Leads, Body 5x5mm, Pitch 0.5mm, Thermal Pad 3.3x3.3mm"
  oval 0.69x0.28 smd paste-1 mask+0.07: 1(-2.62,1.75) 2(-2.62,1.25) 3(-2.62,0.75) 4(-2.62,0.25) 5(-2.62,-0.25) 6(-2.62,-0.75) 7(-2.62,-1.25) 8(-2.62,-1.75) 17(2.62,-1.75) 18(2.62,-1.25) 19(2.62,-0.75) 20(2.62,-0.25) 21(2.62,0.25) 22(2.62,0.75) 23(2.62,1.25) 24(2.62,1.75)
  oval 0.28x0.69 smd paste-1 mask+0.07: 9(-1.75,-2.62) 10(-1.25,-2.62) 11(-0.75,-2.62) 12(-0.25,-2.62) 13(0.25,-2.62) 14(0.75,-2.62) 15(1.25,-2.62) 16(1.75,-2.62) 25(1.75,2.62) 26(1.25,2.62) 27(0.75,2.62) 28(0.25,2.62) 29(-0.25,2.62) 30(-0.75,2.62) 31(-1.25,2.62) 32(-1.75,2.62)
  rect 3.3x3.3 smd paste-2 mask+0.07: 33(0,0)
  silkscreen extent -3.64,-2.39 2.39,2.39, body extent -2.5,-2.5 2.5,2.5, height 1
MICT-SE-8_N [mm] "SOIC, 8-Leads, Body 5.5x5.5mm, Pitch 1.27mm, IPC Medium Density"
  oval 1.7x0.6 smd: 1(-3.575,1.905) 2(-3.575,0.635) 3(-3.575,-0.635) 4(-3.575,-1.905) 5(3.575,-1.905) 6(3.575,-0.635) 7(3.575,0.635) 8(3.575,1.905)
  silkscreen extent -3.7,-2.75 2.33,2.88, body extent -2.75,-2.75 2.75,2.75, height 0.05
MOLX-67503-1020_V [mm] "Mini USB Connector, SMT, Righer Angle"
  rrect50% 2.8x0.5 smd: 1(0,0) 2(0,-0.8) 3(0,-1.6) 4(0,-2.4) 5(0,-3.2)
  rrect50% 3.5x2.05 smd: 6(0.025,3.325) 8(0.025,-6.525)
  rrect50% 4x2.05 smd: 7(-4.225,3.325) 9(-4.225,-6.525)
  round 0.9 hole 0.9 unplated: X(-2.325,-3.8) Y(-2.325,0.6)
  silkscreen extent -8.25,-4.85 2,1.65, body extent -8.22,-6.56 0.78,3.34, height 3.95
"net tie" [mm] "two pads connected to form a net tie"
  rect 0.3x0.3 smd: 0(-0.25,0) 1(0.275,0)
  Top Layer lines w0.254: -0.25,0 0.275,0
"NXP SOT457" [mm] "6 pin SOT457 smd package, NXP"
  rect 0.7x0.45 smd: 1(-1.2,0.95) 2(-1.2,0) 3(-1.2,-0.95) 4(1.2,-0.95) 5(1.2,0) 6(1.2,0.95)
  silkscreen extent -1.32,-1.55 0.45,1.85, body extent -1.4,-1.5 1.4,1.5, height 1.01
OMRON-B3S-1000-4_V [mm] "SMD, 4-Leads, Body 6.6x6mm"
  rect 1.55x1.3 smd: 1(-3.975,2.25) 2(3.975,2.25) 3(-3.975,-2.25) 4(3.975,-2.25)
  silkscreen extent -5.42,-3.3 3,3.3, body extent -4.5,-3.3 4.5,3.3, height 4.4
PCE-BH2542-20-SPGRH-3.0_VA [mm] "Box Header, Pitch 2.54mm, 2x10 Position, Height 9mm, Tail Length 3mm"
  rect 0.96x4.5 smd: 1(-11.43,0) 3(-8.89,0) 5(-6.35,0) 7(-3.81,0) 9(-1.27,0) 11(1.27,0) 13(3.81,0) 15(6.35,0) 17(8.89,0) 19(11.43,0)
  rect 0.96x4.5 smd far side: 2(-11.43,0) 4(-8.89,0) 6(-6.35,0) 8(-3.81,0) 10(-1.27,0) 12(1.27,0) 14(3.81,0) 16(6.35,0) 18(8.89,0) 20(11.43,0)
  silkscreen extent -16.51,-3.43 16.51,2.25, body extent -16.51,-1 16.51,11, height 4.2
PW14_N [mm] "TSOP, 14-Leads, Body 5x4.4mm, Pitch 0.65mm, IPC Medium Density"
  oval 1.7x0.35 smd: 1(-2.85,1.95) 2(-2.85,1.3) 3(-2.85,0.65) 4(-2.85,0) 5(-2.85,-0.65) 6(-2.85,-1.3) 7(-2.85,-1.95) 8(2.85,-1.95) 9(2.85,-1.3) 10(2.85,-0.65) 11(2.85,0) 12(2.85,0.65) 13(2.85,1.3) 14(2.85,1.95)
  silkscreen extent -2.97,-2.55 1.6,2.8, body extent -2.25,-2.55 2.25,2.55, height 1.2
PW0020A_L [mm] "SOP, 20-Leads, Body 6.6x4.5mm, Pitch 0.65mm, IPC High Density"
  rrect25% 1.2x0.4 smd: 1(-2.85,2.925) 2(-2.85,2.275) 3(-2.85,1.625) 4(-2.85,0.975) 5(-2.85,0.325) 6(-2.85,-0.325) 7(-2.85,-0.975) 8(-2.85,-1.625) 9(-2.85,-2.275) 10(-2.85,-2.925) 11(2.85,-2.925) 12(2.85,-2.275) 13(2.85,-1.625) 14(2.85,-0.975) 15(2.85,-0.325) 16(2.85,0.325) 17(2.85,0.975) 18(2.85,1.625) 19(2.85,2.275) 20(2.85,2.925)
  silkscreen extent -2.97,-3.3 1.85,3.8, body extent -3.21,-3.25 3.21,3.25, height 1
RESC0603(1608)_L [mm] "Chip Resistor, Body 1.6x0.8mm, IPC High Density"
  rect 0.7x0.9 smd: 1(-0.7,0) 2(0.7,0)
  silkscreen extent -0.05,-0.35 0.05,0.35, body extent -0.85,-0.47 0.85,0.47, height 0.6
RESC0603(1608)_M [mm] "Chip Resistor, Body 1.6x0.8mm, IPC Low Density"
  rect 1.1x1.1 smd: 1(-0.9,0) 2(0.9,0)
  silkscreen extent -0.05,-0.45 0.05,0.45, body extent -0.85,-0.47 0.85,0.47, height 0.6
RESC0603(1608)_N [mm] "Chip Resistor, Body 1.6x0.8mm, IPC Medium Density"
  rect 0.9x1 smd: 1(-0.8,0) 2(0.8,0)
  silkscreen extent -0.05,-0.4 0.05,0.4, body extent -0.85,-0.47 0.85,0.47, height 0.6
SCREW-5.0-2WAYS_V [mm] "Socket, Screw Terminal Block, 2-Leads, Pitch 5mm, 90 Degree Angle, Through-Hole"
  rect 2.05x2.05 hole 1.55: 1(-2.5,0)
  round 2.05 hole 1.55: 2(2.5,0)
  silkscreen extent -5.72,-5.5 5,5.1, body extent -5,-5.5 5.02,5.1, height 18.2
SMTC-HTSW-107-42-X-D [mm] "SQ Post Hi-Temp Terminal Strip Assembly, 2x7 Pins, Vertical, 2.54mm Pitch, Male"
  rect 1.55x1.55 hole 1.02: 1(0,0)
  round 1.55 hole 1.02: 2(0,2.45) 3(2.54,0) 4(2.54,2.45) 5(5.08,0) 6(5.08,2.45) 7(7.62,0) 8(7.62,2.45) 9(10.16,0) 10(10.16,2.45) 11(12.7,0) 12(12.7,2.45) 13(15.24,0) 14(15.24,2.45)
  silkscreen extent -1.33,-1.29 16.57,3.73, body extent -1.27,-1.31 16.51,3.77, height 10.67
SMTC-MTLW-112-07-X-S-125 [mm] "Terminal Assembly, 1x12 Pins, Vertical, 2.54mm Pitch, Male"
  rect 1.52x1.52 hole 1.02: 1(0,0)
  round 1.52 hole 1.02: 2(2.54,0) 3(5.08,0) 4(7.62,0) 5(10.16,0) 6(12.7,0) 7(15.24,0) 8(17.78,0) 9(20.32,0) 10(22.86,0) 11(25.4,0) 12(27.94,0)
  silkscreen extent -1.46,-1.24 29.4,1.24, body extent -1.27,-1.24 29.21,1.24, height 4.7
SMTC-MTLW-116-07-X-S-265 [mm] "Terminal Assembly, 1x16 Pins, Vertical, 2.54mm Pitch, Male"
  rect 1.52x1.52 hole 1.02: 1(0,0)
  round 1.52 hole 1.02: 2(2.54,0) 3(5.08,0) 4(7.62,0) 5(10.16,0) 6(12.7,0) 7(15.24,0) 8(17.78,0) 9(20.32,0) 10(22.86,0) 11(25.4,0) 12(27.94,0) 13(30.48,0) 14(33.02,0) 15(35.56,0) 16(38.1,0)
  silkscreen extent -1.46,-1.24 39.56,1.24, body extent -1.27,-1.24 39.37,1.24, height 8.25
SMTC-TSW-102-26-XX-S [mm] ".025 SQ Post Terminal Strip Assembly, 1x2 Pins, Vertical, 2.54mm Pitch, Male"
  rect 1.55x1.55 hole 1.02: 1(0,0)
  round 1.55 hole 1.02: 2(2.54,0)
  silkscreen extent -1.46,-1.27 4,1.27, body extent -1.4,-1.27 3.81,1.27, height 8.38
SMTC-TSW-103-08-X-D [mm] ".025 SQ Post Terminal Strip Assembly, 2x3 Pins, Vertical, 2.54mm Pitch, Male"
  rect 1.55x1.55 hole 1.02: 1(0,0)
  round 1.55 hole 1.02: 2(0,2.54) 3(2.54,0) 4(2.54,2.54) 5(5.08,0) 6(5.08,2.54)
  silkscreen extent -1.46,-1.27 6.54,3.81, body extent -1.27,-1.27 6.35,3.81, height 8.38
SMTC-TSW-104-08-X-S [mm] ".025 SQ Post Terminal Strip Assembly, 1x4 Pins, Vertical, 2.54mm Pitch, Male"
  rect 1.55x1.55 hole 1.02: 1(0,0)
  round 1.55 hole 1.02: 2(2.54,0) 3(5.08,0) 4(7.62,0)
  silkscreen extent -1.46,-1.27 9.08,1.27, body extent -1.27,-1.27 8.89,1.27, height 8.38
SMTC-TSW-105-05-X-D [mm] ".025 SQ Post Terminal Strip Assembly, 2x5 Pins, Vertical, 2.54mm Pitch, Male"
  rect 1.55x1.55 hole 1.02: 1(0,0)
  round 1.55 hole 1.02: 2(0,2.54) 3(2.54,0) 4(2.54,2.54) 5(5.08,0) 6(5.08,2.54) 7(7.62,0) 8(7.62,2.54) 9(10.16,0) 10(10.16,2.54)
  silkscreen extent -1.46,-1.27 11.62,3.81, body extent -1.27,-1.27 11.43,3.81, height 5.21
SMTC-TSW-105-05-X-S [mm] ".025 SQ Post Terminal Strip Assembly, 1x5 Pins, Vertical, 2.54mm Pitch, Male"
  rect 1.55x1.55 hole 1.02: 1(0,0)
  round 1.55 hole 1.02: 2(2.54,0) 3(5.08,0) 4(7.62,0) 5(10.16,0)
  silkscreen extent -1.46,-1.27 11.62,1.27, body extent -1.27,-1.27 11.43,1.27, height 5.21
SMTC-TSW-116-08-X-S [mm] ".025 SQ Post Terminal Strip Assembly, 1x16 Pins, Vertical, 2.54mm Pitch, Male"
  rect 1.55x1.55 hole 1.02: 1(0,0)
  round 1.55 hole 1.02: 2(2.54,0) 3(5.08,0) 4(7.62,0) 5(10.16,0) 6(12.7,0) 7(15.24,0) 8(17.78,0) 9(20.32,0) 10(22.86,0) 11(25.4,0) 12(27.94,0) 13(30.48,0) 14(33.02,0) 15(35.56,0) 16(38.1,0)
  silkscreen extent -1.46,-1.27 39.56,1.27, body extent -1.27,-1.27 39.37,1.27, height 8.38
TJ5A_M [mm] "D2-PAK, 6-Leads, Body 9.9x10.2mm, Pitch 1.7mm, Lead Span 14mm, IPC Low Density"
  rect 3.5x1 smd: 1(-6.05,3.4) 2(-6.05,1.7) 3(-6.05,0) 4(-6.05,-1.7) 5(-6.05,-3.4)
  rect 7.7x5.8 smd: 6(3.95,0)
  silkscreen extent -6.17,-5.2 -0.3,5.2, body extent -1.9,-5.2 8.2,5.2, height 2.1